# Altium PCB BSE_APPS_Error_Detection.PcbDoc
Units mil, origin at the board's own origin, x right, y up, seen from the top; angles counter-clockwise.
Board outline 3937.01 x 2349.61 mil, 2 copper layers (Top, Bottom); 22 components, 28 nets, 127 pads, 41 vias.
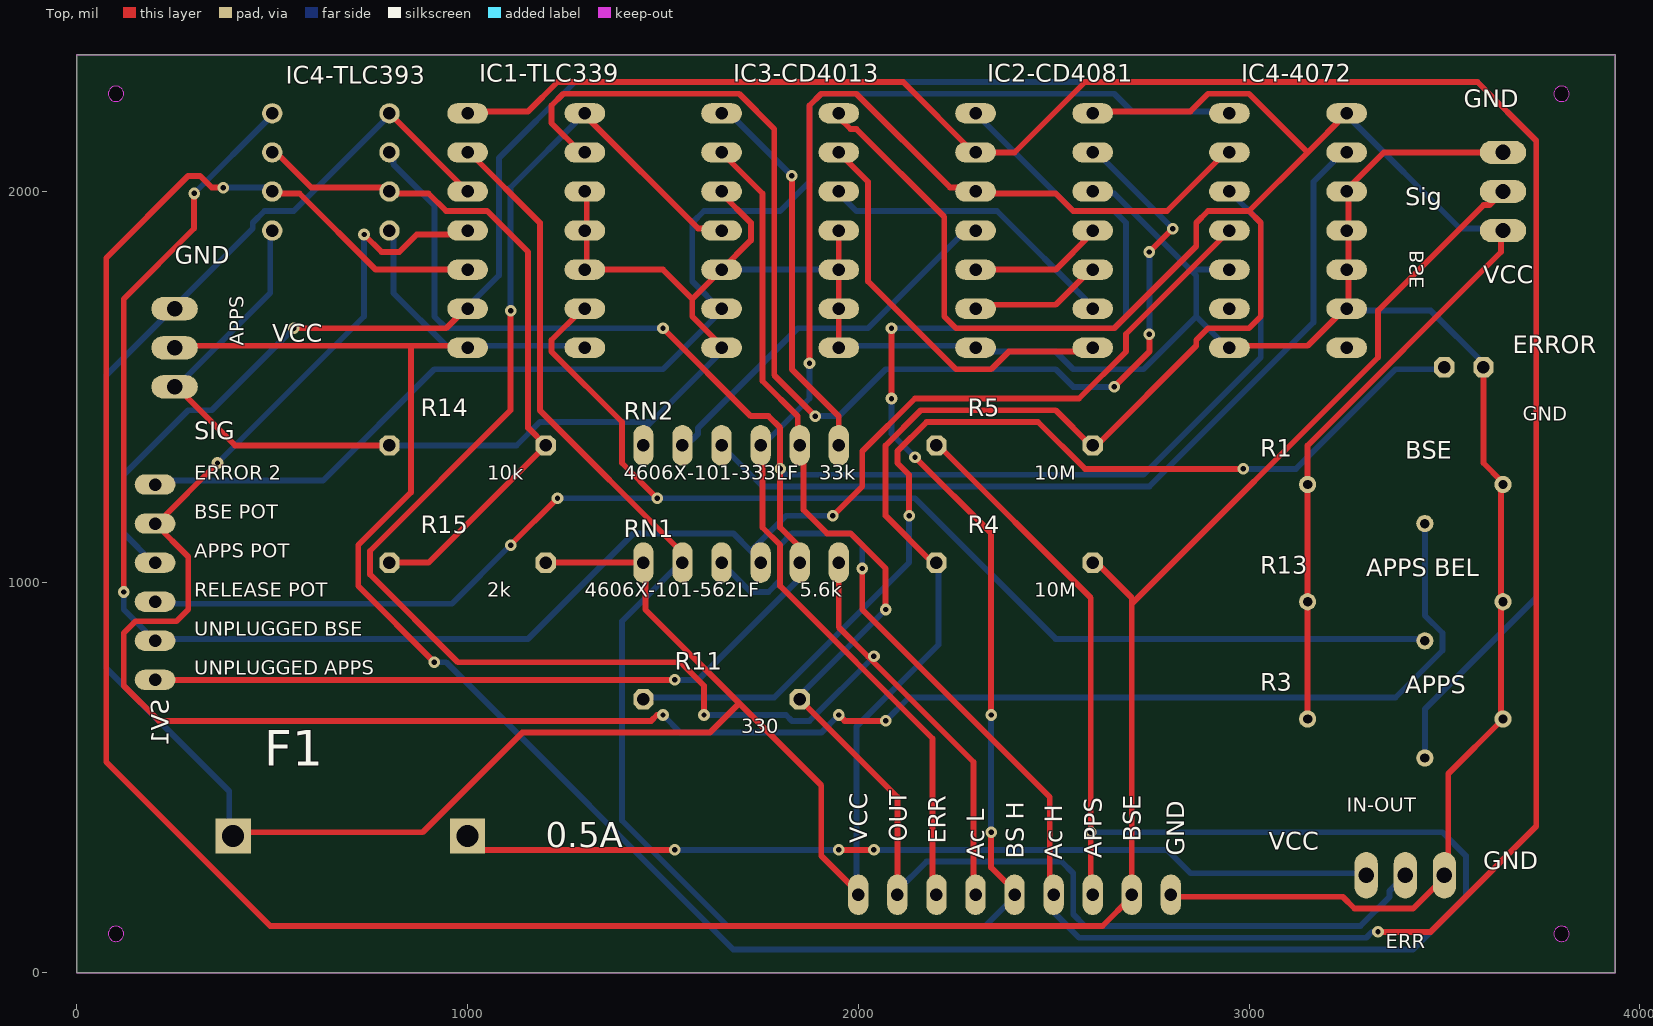
[diagram p0: Top view]
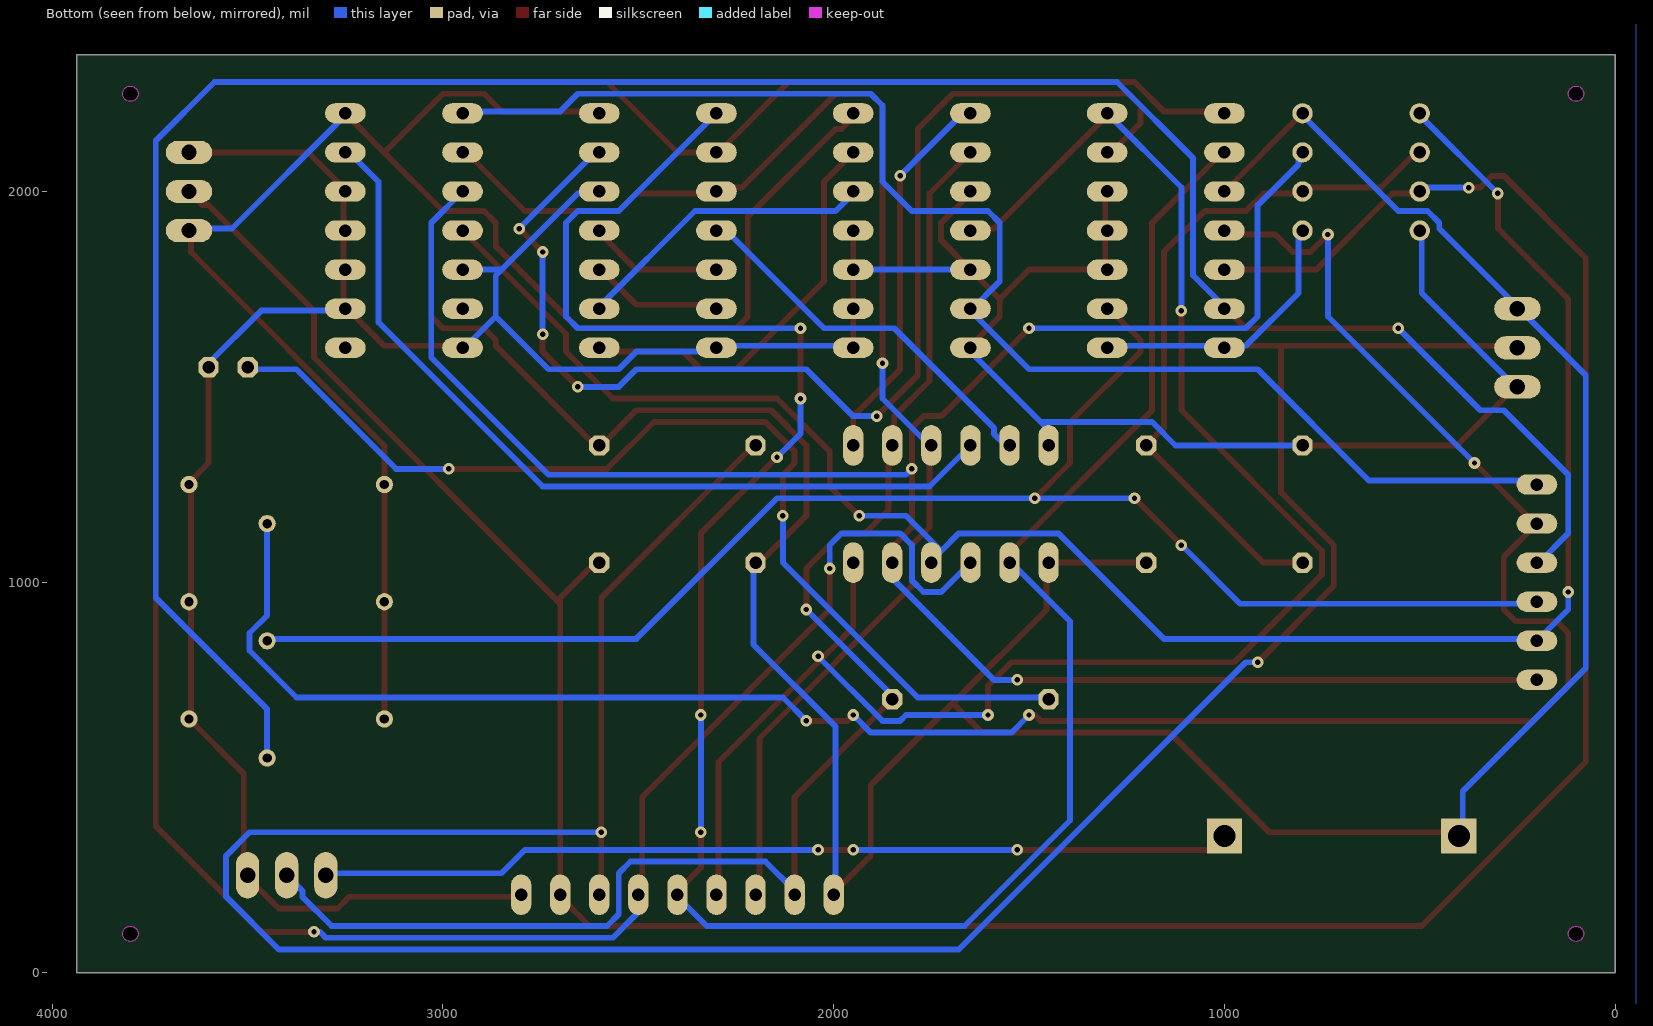
[diagram p1: Bottom view, seen from below]

## Layer stack, top to bottom
Top Solder: solder mask 0.4, Solder Resist, Dk 3.5
Top: signal copper 1.378
Dielectric 1: dielectric 12.6, FR-4, Dk 4.8
Bottom: signal copper 1.378
Bottom Solder: solder mask 0.4, Solder Resist, Dk 3.5

## Board outline
0,2349.61 0,0 3937.01,0 3937.01,2349.61
cut-out: 3800,80.31 ccw(c3800,100) 3819.68,100 ccw(c3800,100) 3800,119.69 ccw(c3800,100) 3780.32,100 ccw(c3800,100)
cut-out: 3800,2230.32 ccw(c3800,2250) 3819.68,2250 ccw(c3800,2250) 3800,2269.68 ccw(c3800,2250) 3780.32,2250 ccw(c3800,2250)
cut-out: 100,2230.32 ccw(c100,2250) 119.69,2250 ccw(c100,2250) 100,2269.68 ccw(c100,2250) 80.31,2250 ccw(c100,2250)
cut-out: 100,80.31 ccw(c100,100) 119.69,100 ccw(c100,100) 100,119.69 ccw(c100,100) 80.31,100 ccw(c100,100)

## Design rules (kind name [scope] priority, off if disabled: settings)
BoardOutlineClearance mdCopperDimension [All] p1: gap=10 ignorepadtopadclearanceinfootprint=FALSE except(0: Arc-SplitContinuation Track-SplitContinuation SMDPad-SplitContinuation THPad-SplitContinuation Via-SplitContinuation Fill-SplitContinuation Poly-SplitContinuation Region-SplitContinuation Text-SplitContinuation; 40: Poly-OutlineEdge Poly-CavityEdge Poly-CutoutEdge Poly-SplitBarrior)
Clearance "Clearance (Same Net)" [All] p1: gap=15 ignorepadtopadclearanceinfootprint=FALSE except(6: SMDPad-SMDPad SMDPad-THPad SMDPad-Via)
Clearance [All] p2: gap=15 ignorepadtopadclearanceinfootprint=FALSE
HoleSize [All] p1: absolutevalues=TRUE maxlimit=100000 minlimit=13.78 maxpercent=80.000 minpercent=20.000
HoleToHoleClearance mdDrill [All] p1: gap=6 allowstackedmicrovias=TRUE
MinimumSolderMaskSliver [All] p1 off: minsoldermaskwidth=10
PasteMaskExpansion mlMinCreamFrame [All] p1: expansion=0
PolygonConnect PolygonConnect_For_PolygonThermal_ON_Width60000_Gap100000 [InPolygonClass('PolygonThermal_ON_Width60000_Gap100000') vs Not IsVia] p1: connectstyle=Relief reliefconductorwidth=6 reliefentries=4 polygonreliefangle="90 Angle" airgapwidth=10
PolygonConnect ThermalVias [IsVia] p2: connectstyle=Direct reliefconductorwidth=10 reliefentries=4 polygonreliefangle="90 Angle" airgapwidth=10
PolygonConnect [All] p3: connectstyle=Relief reliefconductorwidth=10 reliefentries=4 polygonreliefangle="90 Angle" airgapwidth=10
RoutingVias [All] p1: holewidth=13.78 width=29.78 viastyle="Through Hole" minholewidth=13.78 minwidth=29.78 maxholewidth=100 maxwidth=100
SolderMaskExpansion mlMinStopFrame [All] p1: expansion=4 istentingtop=FALSE
Width [All] p1: maxlimit=10 minlimit=15 preferedwidth=15
26 further rules are at their usual default settings.

## Classes and differential pairs
polygon class PolygonThermal_ON_Width60000_Gap100000: Polygon_1_Net_N$1 Polygon_1_Net_N$2

## Components (designator, comment, footprint, x,y, rotation, side; value= is the part's Value field where it differs from the comment)
APPS "22-23-2031" 22-23-2031 250,1600 r270 top
BSE "22-23-2031" 22-23-2031 3650,2000 r90 top
ERROR "LED1" LED5MM 3550,1550 r0 top
F1 "FUSEBLANK_5X20MM" FUSE_HOLDER_5X20MM 400,350 r0 top
GND "" FE09W 2400,200 r180 top
IC1-TLC339 "TLC339P" DIL14 1150,1900 r270 top
IC2-CD4081 "4081N" DIL14 2450,1900 r270 top
IC3-CD4013 "4013N" DIL14 1800,1900 r270 top
IC4-4072 "4072N" DIL14 3100,1900 r270 top
IC4-TLC393 "TLC393P" DIL08 650,2050 r270 top
IN-OUT "22-23-2031" 22-23-2031 3400,250 r0 top
R1 "10k" RTRIM3006P 3450,1200 r0 top
R3 "10k" RTRIM3006P 3450,600 r0 top
R4 "10M" 0207/10 2400,1050 r0 top
R5 "10M" 0207/10 2400,1350 r0 top
R11 "330" 0207/10 1650,700 r0 top
R13 "10k" RTRIM3006P 3450,900 r0 top
R14 "10k" 0207/10 1000,1350 r0 top
R15 "2k" 0207/10 1000,1050 r0 top
RN1 "5.6k" SIL6 1700,1050 r0 top
RN2 "33k" SIL6 1700,1350 r0 top
SV1 "" FE06W 200,1000 r90 top

## Footprints (in the part's own frame and the unit in brackets; to place one, negate y for a bottom-side part, rotate by r counter-clockwise, add the part's x,y. Pads: shape width x height; smd on the part's side, far side on the other; paste and mask are expansions set on the pad)
22-23-2031 [mm] "22-23-2031"
  oval 1.508x3.016 hole 1: 1(-2.54,0) 2(0,0) 3(2.54,0)
  body extent -3.3,-1.51 3.3,1.51, height 1.27
0207/10 [mil] "0207/10"
  oct 52x52 / inner round 48.04 / far side oct 52x52 hole 32: 1(-200,0) 2(200,0)
  body extent -224,-24 224,24, height 150
DIL08 [mil] "DIL08"
  round 52 hole 32: 1(-150,-150) 2(-50,-150) 3(50,-150) 4(150,-150) 5(150,150) 6(50,150) 7(-50,150) 8(-150,150)
  body extent -176,-176 176,176, height 50
DIL14 [mil] "DIL14"
  oval 52x104 hole 32: 1(-300,-150) 2(-200,-150) 3(-100,-150) 4(0,-150) 5(100,-150) 6(200,-150) 7(300,-150) 8(300,150) 9(200,150) 10(100,150) 11(0,150) 12(-100,150) 13(-200,150) 14(-300,150)
  body extent -326,-202 326,202, height 50
FE06W [mil] "FE06W"
  oval 52x104 hole 32: 1(-250,0) 2(-150,0) 3(-50,0) 4(50,0) 5(150,0) 6(250,0)
  body extent -276,-52 276,52, height 150
FE09W [mil] "FE09W"
  oval 52x104 hole 32: 1(-400,0) 2(-300,0) 3(-200,0) 4(-100,0) 5(0,0) 6(100,0) 7(200,0) 8(300,0) 9(400,0)
  body extent -426,-52 426,52, height 150
FUSE_HOLDER_5X20MM [mil] "FUSE_HOLDER_5X20MM"
  rect 90x90 / inner round 83.15 / far side rect 90x90 hole 56: 1(0,0) 2(600,0)
  body extent -42,-42 642,42, height 50
LED5MM [mil] "LED5MM"
  oct 52x52 / inner round 48.04 / far side oct 52x52 hole 32: A(-50,0) K(50,0)
  body extent -88,-88 88,88, height 150
RTRIM3006P [mil] "RTRIM3006P"
  round 44 hole 24: 1(-300,50) 2(0,-50) 3(200,50)
  body extent -322,-72 222,72, height 50
SIL6 [mil] "SIL6"
  oval 52x104 hole 32: 1(-250,0) 2(-150,0) 3(-50,0) 4(50,0) 5(150,0) 6(250,0)
  body extent -283,-52 276,52, height 150

## Part data
ERROR: library part LED5MM, PackageName=LED5MM
F1: library part FUSE_HOLDER_5X20MM, PackageName=FUSE_HOLDER_5X20MM
GND: library part FE09W, PackageName=FE09W
IC1-TLC339 IC2-CD4081 IC3-CD4013 IC4-4072: library part DIL14, PackageName=DIL14
IC4-TLC393: library part DIL08, PackageName=DIL08
R1 R3 R13: library part RTRIM3006P, PackageName=RTRIM3006P
R4 R5 R11 R14 R15: library part 0207/10, PackageName=0207/10
RN1 RN2: library part SIL6, PackageName=SIL6
SV1: library part FE06W, PackageName=FE06W
APPS BSE IN-OUT: PackageName=22-23-2031

## Free pads (board coordinates)
  round 39.37 hole 39.37 unplated: MH1(100,2250) MH2(100,100) MH3(3800,100) MH4(3800,2250)

## Via types
v1: diameter 29.78/29.78 (per signal layer), hole 13.78, Top to Bottom, 41 vias

## Nets (pads, with @x,y where several pads share a name; then routed paths per layer and width w, separated by ;. In a path a pad name is that pad's centre, name@x,y a point inside that pad or via, vN(x,y) a via of type N, cw(c..) or ccw(c..) an arc to the next point about the centre after c; other vN are vias at no path point)
+12V: APPS.1 BSE.1 F1.1 GND.9 IC1-TLC339.3 IC2-CD4081.14 IC3-CD4013.14 IC4-4072.14 IC4-TLC393.8 R1.1 R3.1 R4.1 R5.2 R13.1 R15.2 RN1.1 | length 12705.5
  Top w15: F1.1 405,360 885,360 1140,615 1620,615 1695,690 ; IC4-TLC393.8 IC1-TLC339.3 ; R15.2 RN1.1 1455,1050 1455,930 1695,690 ; IC3-CD4013.14 1950,2190 1980,2160 1995,2160 2220,1935 2220,1680 2250,1650 2655,1650 2865,1860 2865,1920 2895,1950 3000,1950 ; GND.9 1995,210 1905,300 1905,480 1695,690 ; R4.1 2190,1050 2070,1170 2070,1350 2160,1440 2505,1440 2595,1350 R5.2 2610,1350 2865,1605 2865,1620 2895,1650 3000,1650 3030,1680 3030,1920 3000,1950 ; IC2-CD4081.14 2610,2205 2850,2205 2895,2250 3000,2250 3150,2100 ; R3.1 R13.1 R1.1 3150,1350 3645,1845 3645,1890 BSE.1 ; IC4-4072.14 3150,2100 ; 3000,1950 3150,2100
  Bottom w15: F1.1 390,360 390,465 75,780 75,1530 240,1695 APPS.1 255,1710 450,1905 450,1920 480,1950 555,1950 795,2190 IC4-TLC393.8 ; GND.9 1995,210 1995,630 2205,840 2205,1050 R4.1 ; IC4-4072.14 3255,2190 3540,1905 3645,1905 BSE.1
APPS_ACTUATED: GND.6 IC1-TLC339.14 IC3-CD4013.4 RN1.6 | length 4453.7
  Top w15: v1(1110,1695) 1110,1440 750,1080 750,1020 975,795 1545,795 1605,735 v1(1605,660) ; IC1-TLC339.14 1305,2190 1590,1905 1650,1905 IC3-CD4013.4 ; RN1.6 1950,885 2025,810 ; v1(2040,810) 2025,810 ; GND.6 2295,210 2295,540 2025,810
  Bottom w15: v1(1110,1695) 1110,2010 IC1-TLC339.14 ; v1(1605,660) 1815,660 1830,645 1875,645 v1(2040,810)
APPS_HIGH: GND.4 IC1-TLC339.1 IC2-CD4081.2 RN1.3 | length 7775.7
  Top w15: IC1-TLC339.1 1005,2205 1155,2205 1230,2280 2115,2280 2295,2100 IC2-CD4081.2 2400,2100 2580,2280 3585,2280 3735,2130 3735,375 3465,105 v1(3330,105) ; v1(2010,1035) 2010,930 2490,450 2490,210 GND.4
  Bottom w15: RN1.3 1725,975 1770,975 1800,1005 1800,1095 1830,1125 1980,1125 2010,1095 v1(2010,1035) ; GND.4 2505,195 2505,150 2565,90 3300,90 3315,105 v1(3330,105)
APPS_POT: IC1-TLC339.6 R3.2 SV1.4 | length 6229.4
  Top w15: v1(555,1650) 945,1650 990,1695 IC1-TLC339.6
  Bottom w15: SV1.4 195,1050 120,1125 120,1275 285,1440 345,1440 v1(555,1650) ; IC1-TLC339.6 1005,1710 1080,1785 1080,2085 1275,2280 3585,2280 3735,2130 3735,960 3450,675 R3.2
APPS_SIGNAL: APPS.2 GND.3 IC1-TLC339.7 IC1-TLC339.8 IC4-TLC393.5 R5.1 | length 7822.4
  Top w15: APPS.2 255,1605 855,1605 ; v1(915,795) 720,990 720,1095 855,1230 855,1605 ; IC1-TLC339.7 990,1605 855,1605 ; R5.1 2205,1350 2595,960 v1(2595,360) 2595,210 GND.3
  Bottom w15: IC4-TLC393.5 810,1890 810,1740 945,1605 990,1605 IC1-TLC339.7 1005,1605 1290,1605 IC1-TLC339.8 ; v1(915,795) 945,795 1680,60 3420,60 3555,195 3555,300 3495,360 v1(2595,360)
BSE_HIGH: GND.5 IC1-TLC339.2 IC2-CD4081.1 RN1.2 | length 6097.6
  Top w15: IC1-TLC339.2 1005,2100 1185,1920 1185,1440 1545,1080 1545,1050 RN1.2 ; v1(2085,1470) v1(2085,1650) ; v1(2145,1320) 2340,1125 v1(2340,660) ; v1(2340,360) 2340,270 2400,210 GND.5
  Bottom w15: RN1.2 1545,1050 1395,900 1395,390 1665,120 2325,120 2400,195 GND.5 ; v1(2085,1470) 2085,1380 v1(2145,1320) ; v1(2085,1650) 2655,1650 2685,1680 2685,1920 2655,1950 2550,1950 IC2-CD4081.1 ; v1(2340,360) v1(2340,660)
BSE_POT: IC1-TLC339.4 R1.2 SV1.5 | length 5730.3
  Top w15: v1(360,1305) 210,1155 SV1.5 285,1065 285,930 255,900 150,900 120,870 120,735 210,645 1470,645 1485,660 v1(1500,660) ; v1(735,1890) 780,1845 825,1845 870,1890 990,1890 IC1-TLC339.4 ; v1(1950,660) 1965,645 v1(2070,645)
  Bottom w15: v1(360,1305) 735,1680 v1(735,1890) ; v1(1500,660) 1545,615 1905,615 v1(1950,660) ; v1(2070,645) 2130,705 3375,705 3495,825 3495,870 3450,915 R1.2
BSE_SIGNAL: BSE.2 GND.2 IC1-TLC339.5 IC4-TLC393.3 R4.2 | length 7592.1
  Top w15: v1(375,2010) 345,2010 315,2040 285,2040 75,1830 75,540 495,120 2625,120 2700,195 GND.2 2700,945 ; IC4-TLC393.3 510,1995 570,1995 765,1800 IC1-TLC339.5 ; R4.2 2610,1050 2700,960 2700,945 ; BSE.2 3615,1965 3600,1965 3330,1695 3330,1575 2700,945
  Bottom w15: v1(375,2010) 495,2010 IC4-TLC393.3
CONNECTION_ERR: IC4-TLC393.2 IC4-TLC393.6 R14.2 R15.1 | length 1799.7
  Top w15: IC4-TLC393.2 510,2100 600,2010 795,2010 IC4-TLC393.6 810,1995 900,1995 945,1950 1050,1950 1155,1845 1155,1395 R14.2 900,1050 R15.1
ERROR_1: GND.7 IC2-CD4081.3 IC4-4072.2 RN2.4 | length 3539
  Top w15: RN2.4 1755,1350 1755,1140 1800,1095 1800,990 2190,600 2190,210 GND.7 ; v1(1875,1560) 1875,2220 1905,2250 1995,2250 2235,2010 2295,2010 IC2-CD4081.3 2310,1995 2505,1995 2550,1950 2790,1950 2940,2100 IC4-4072.2
  Bottom w15: RN2.4 1755,1350 1875,1470 v1(1875,1560)
ERROR_2: IC3-CD4013.6 IC4-4072.1 SV1.6 | length 3541.1
  Bottom w15: SV1.6 210,1260 630,1260 915,1545 1500,1545 IC3-CD4013.6@1650,1695 ; IC3-CD4013.6 IC3-CD4013.6@1650,1695 ; IC4-4072.1 2940,2205 2700,2205 2655,2250 1905,2250 1875,2220 1875,2025 1800,1950 1605,1950 1575,1920 1575,1770 IC3-CD4013.6@1650,1695
GND: APPS.3 BSE.3 ERROR.K GND.1 IC1-TLC339.10 IC1-TLC339.11 IC1-TLC339.12 IC2-CD4081.7 IC2-CD4081.12 IC3-CD4013.3 IC3-CD4013.5 IC3-CD4013.7 IC3-CD4013.8 IC3-CD4013.9 IC3-CD4013.10 IC3-CD4013.11 IC4-4072.5 IC4-4072.7 IC4-4072.9 IC4-4072.10 IC4-4072.11 IC4-4072.12 IC4-TLC393.4 IN-OUT.3 R1.3 R3.3 R13.3 R14.1 RN2.1 | length 9115.9
  Top w15: APPS.3 255,1500 405,1350 R14.1 ; IC1-TLC339.10 IC1-TLC339.10@1305,1800 ; IC1-TLC339.12 1305,1995 1305,1905 IC1-TLC339.11 1305,1890 IC1-TLC339.10@1305,1800 ; IC3-CD4013.7 1650,1605 1575,1680 1575,1725 ; IC3-CD4013.3 1650,1995 1725,1920 1725,1875 IC3-CD4013.5 1575,1725 ; IC3-CD4013.8 IC3-CD4013.9 IC3-CD4013.10 IC3-CD4013.11 ; GND.1 2805,195 3240,195 3270,165 3420,165 3495,240 IN-OUT.3 3510,255 3510,510 R3.3 3645,660 3645,945 R13.3 3645,960 3645,1245 R1.3 3645,1260 3600,1305 ERROR.K ; IC4-4072.7 2955,1605 3150,1605 3240,1695 IC4-4072.9 3255,1710 IC4-4072.10@3255,1800 ; IC4-4072.10 IC4-4072.10@3255,1800 ; BSE.3 3345,2100 3255,2010 IC4-4072.12 3255,1995 3255,1905 IC4-4072.11 3255,1890 IC4-4072.10@3255,1800 ; IC1-TLC339.10@1305,1800 1500,1800 1575,1725
  Bottom w15: APPS.3 255,1500 495,1740 495,1890 IC4-TLC393.4 ; R14.1 1125,1350 1185,1410 1470,1410 ; RN2.1 1455,1350 1455,1395 1470,1410 ; IC3-CD4013.7 1650,1590 1470,1410 ; IC3-CD4013.5 IC3-CD4013.10 ; IC3-CD4013.8 1950,1605 2295,1605 IC2-CD4081.7 2310,1590 2505,1590 2550,1545 2730,1545 2865,1680 ; IC2-CD4081.12 2610,1995 2655,1995 2850,1800 ; IC4-4072.7 2940,1605 2865,1680 ; IC4-4072.5 2850,1800 ; IC4-4072.9 3255,1695 3465,1695 3600,1560 ERROR.K ; 2850,1800 2865,1785 2865,1680
LATCHED: GND.8 IC3-CD4013.2 IN-OUT.2 R11.2 RN2.5 | length 3850.3
  Top w15: IC3-CD4013.2 1755,1995 1755,1515 1845,1425 1845,1350 RN2.5 1860,1350 1860,1185 1920,1125 1980,1125 2070,1035 v1(2070,930) ; R11.2 2100,450 GND.8
  Bottom w15: R11.2 1845,705 v1(2070,930) ; GND.8 2100,210 2175,285 2520,285 2550,255 2550,150 2580,120 3285,120 3360,195 3360,210 IN-OUT.2
N$1: 
N$2: 
N$5: IC2-CD4081.6 IC2-CD4081.10 | length 341.4
  Top w15: IC2-CD4081.6 2310,1710 2505,1710 2595,1800 IC2-CD4081.10
N$6: IC1-TLC339.13 IC2-CD4081.13 | length 3145.5
  Top w15: IC1-TLC339.13 1290,2100 1215,2175 1215,2220 1245,2250 1695,2250 1785,2160 1785,1530 v1(1890,1425) ; v1(2655,1500) 2745,1590 v1(2745,1635) ; v1(2745,1845) v1(2805,1905)
  Bottom w15: v1(1890,1425) 1950,1425 2070,1545 2505,1545 2550,1500 v1(2655,1500) ; IC2-CD4081.13 2610,2100 v1(2805,1905) ; v1(2745,1635) v1(2745,1845)
N$7: IC3-CD4013.1 RN2.6 | length 991.8
  Top w15: v1(1830,2040) 1830,1545 1950,1425 RN2.6
  Bottom w15: IC3-CD4013.1 1650,2190 1680,2190 v1(1830,2040)
N$8: F1.2 IN-OUT.1 | length 2344.4
  Top w15: F1.2 1035,315 v1(1530,315) ; v1(1950,315) v1(2040,315)
  Bottom w15: v1(1530,315) v1(1950,315) ; v1(2040,315) 2790,315 2850,255 3300,255 IN-OUT.1
N$9: IC2-CD4081.8 IC3-CD4013.13 | length 1054.1
  Top w15: IC3-CD4013.13 2025,2025 2025,1770 2250,1545 2340,1545 2385,1590 2595,1590 IC2-CD4081.8
N$10: ERROR.A R11.1 | length 2710.9
  Top w15: v1(2130,1170) 2130,1275 2100,1305 2100,1335 2175,1410 2460,1410 2580,1290 v1(2985,1290)
  Bottom w15: R11.1 1455,705 1785,705 2130,1050 v1(2130,1170) ; v1(2985,1290) 3120,1290 3375,1545 3495,1545 ERROR.A
N$12: IC2-CD4081.9 IC3-CD4013.12 | length 779.2
  Bottom w15: IC3-CD4013.12 1950,1995 1995,1950 2355,1950 2595,1710 IC2-CD4081.9
N$13: IC2-CD4081.5 IC2-CD4081.11 | length 343.5
  Top w15: IC2-CD4081.5 2505,1800 2595,1890 IC2-CD4081.11
N$14: IC2-CD4081.4 RN2.2 | length 988.6
  Bottom w15: RN2.2 1560,1350 1590,1380 1590,1395 1845,1650 2025,1650 2265,1890 2295,1890 IC2-CD4081.4
N$16: IC4-4072.13 RN2.3 | length 2208.5
  Bottom w15: RN2.3 1755,1245 2745,1245 3165,1665 3165,2025 3240,2100 IC4-4072.13
RELEASE_POT: IC1-TLC339.9 R13.2 SV1.3 | length 4151.2
  Top w15: v1(1110,1095) v1(1230,1215) ; IC1-TLC339.9 1290,1695 1215,1620 1215,1590 1395,1410 1395,1305 v1(1485,1215)
  Bottom w15: SV1.3 210,945 960,945 v1(1110,1095) ; v1(1230,1215) v1(1485,1215) 2145,1215 2505,855 3450,855 R13.2
UNPLUGGED_1: IC4-4072.3 IC4-TLC393.7 RN1.5 SV1.1 | length 5464.4
  Top w15: SV1.1 v1(1530,750) ; v1(1500,1650) 1725,1425 1770,1425 1800,1395 v1(1800,1290) 1800,1140 1845,1095 1845,1050 RN1.5
  Bottom w15: IC4-TLC393.7 810,2100 810,2070 915,1965 915,1680 945,1650 v1(1500,1650) ; v1(1530,750) 1590,750 1845,1005 1845,1050 RN1.5 ; v1(1800,1290) 1815,1275 2730,1275 3030,1575 3030,1920 IC4-4072.3
UNPLUGGED_2: IC4-4072.4 IC4-TLC393.1 RN1.4 SV1.2 | length 4926.5
  Top w15: v1(120,975) 120,1725 300,1905 v1(300,1995) ; v1(1935,1170) 2010,1245 2010,1335 2145,1470 2565,1470 2685,1590 2685,1635 IC4-4072.4
  Bottom w15: v1(120,975) 120,930 SV1.2 210,855 1155,855 1425,1125 1680,1125 RN1.4@1725,1080 ; v1(300,1995) 495,2190 IC4-TLC393.1 ; v1(1935,1170) 1815,1170 RN1.4@1725,1080 ; RN1.4@1725,1080 RN1.4 1755,1050 RN1.4@1725,1080
pads on no net: IC4-4072.6 IC4-4072.8

## Polygon pours and split planes (outlines as drawn)
N$1 on Top "Polygon_1_Net_N$1" (solid, remove dead copper, pour order 1): -103,2453 -103,-148.76 -157.24,-203 3901.24,-203 4153,48.76 4153,2351.24 4000,2504.24 3948.76,2453
N$2 on Bottom "Polygon_1_Net_N$2" (solid, remove dead copper, pour order 0): -53,2503 -53,-153 3951.24,-153 4153,48.76 4153,100 4153,2351.24 4001.24,2503

## Keep-outs
Keep-Out Layer:
  the board outline again, w0

## Silkscreen, mask and mechanical layers (free items; w line width, h text height)
Top Overlay:
  text "GND" at 3550,2200 h77.5
  text "Sig" at 3400,1950 h77.5
  text "GND" at 250,1800 h77.5
  text "VCC" at 3600,1750 h77.5
  text "VCC" at 500,1600 h77.5
  text "GND" at 3700,1400 h62
  text "SIG" at 300,1350 h77.5
  text "BSE" at 3400,1300 h77.5
  text "ERROR 2" at 300,1250 h62
  text "10k" at 1050,1250 h62
  text "4606X-101-333LF" at 1400,1250 h62
  text "33k" at 1900,1250 h62
  text "10M" at 2450,1250 h62
  text "BSE POT" at 300,1150 h62
  text "APPS POT" at 300,1050 h62
  text "APPS BEL" at 3300,1000 h77.5
  text "RELEASE POT" at 300,950 h62
  text "2k" at 1050,950 h62
  text "4606X-101-562LF" at 1300,950 h62
  text "5.6k" at 1850,950 h62
  text "10M" at 2450,950 h62
  text "UNPLUGGED BSE" at 300,850 h62
  text "UNPLUGGED APPS" at 300,750 h62
  text "APPS" at 3400,700 h77.5
  text "330" at 1700,600 h62
  text "OUT" at 2138.83,335.25 h77.5 r90
  text "BSE" at 2738.83,335.13 h77.5 r90
  text "VCC" at 2038.83,332.16 h77.5 r90
  text "ERR" at 2239.02,330.42 h77.5 r90
  text "0.5A" at 1200,300 h108.5
  text "VCC" at 3050,300 h77.5
  text "APPS" at 2638.83,293.07 h77.5 r90
  text "BS H" at 2438.83,292.04 h77.5 r90
  text "Ac L" at 2337.93,290.81 h77.5 r90
  text "Ac H" at 2537.93,290.1 h77.5 r90
  text "GND" at 3600,250 h77.5
  text "ERR" at 3350,50 h62
Dimension:
  the board outline again, w0
Measures:
  lines w6: 3850,2250 4700,2250 4700,100 3800,100 ; 100,100 3800,100 ; 100,100 100,2250 ; 100,100 100,-400 3800,-400 3800,100 ; 100,100 -900,100 -900,2250 100,2250 ; 100,2250 3800,2250 3800,100

## Dimensions
100,2250 to 100,100 on tFinish
100,2250 to 3800,2250 on tFinish
4700,2250 to 4700,100 on tFinish
100,-400 to 3800,-400 on tFinish
-900,2250 to -900,100 on tFinish
0,2349.61 to 3937.01,2349.61 on tFinish
0,2349.61 to 0,0 on tFinish

## Text inside footprints (layer, text, board x,y; h text height)
GND: tPlace "8" at 2075,100 h77.5 r270; tPlace "7" at 2175,100 h77.5 r270; tPlace "6" at 2275,100 h77.5 r270; tPlace "4" at 2475,100 h77.5 r270; tPlace "3" at 2575,100 h77.5 r270; tPlace "5" at 2375,100 h77.5 r270; tPlace "9" at 1975,100 h77.5 r270; tPlace "2" at 2675,100 h77.5 r270
RN1: tPlace "1" at 1360,1030 h60.45
RN2: tPlace "1" at 1360,1330 h60.45
SV1: tPlace "5" at 100,1175 h77.5 r180; tPlace "4" at 100,1075 h77.5 r180; tPlace "3" at 100,975 h77.5 r180; tPlace "6" at 100,1275 h77.5 r180; tPlace "2" at 100,875 h77.5 r180